# Altium PCB pacemakerv3_0.PcbDoc
Units mil, origin at the board's own origin, x right, y up, seen from the top; angles counter-clockwise.
Board outline 2432.01 x 2099.61 mil, 2 copper layers (Top, Bottom), stack 61.858 mil thick; 135 components, 95 nets, 412 pads, 135 vias.
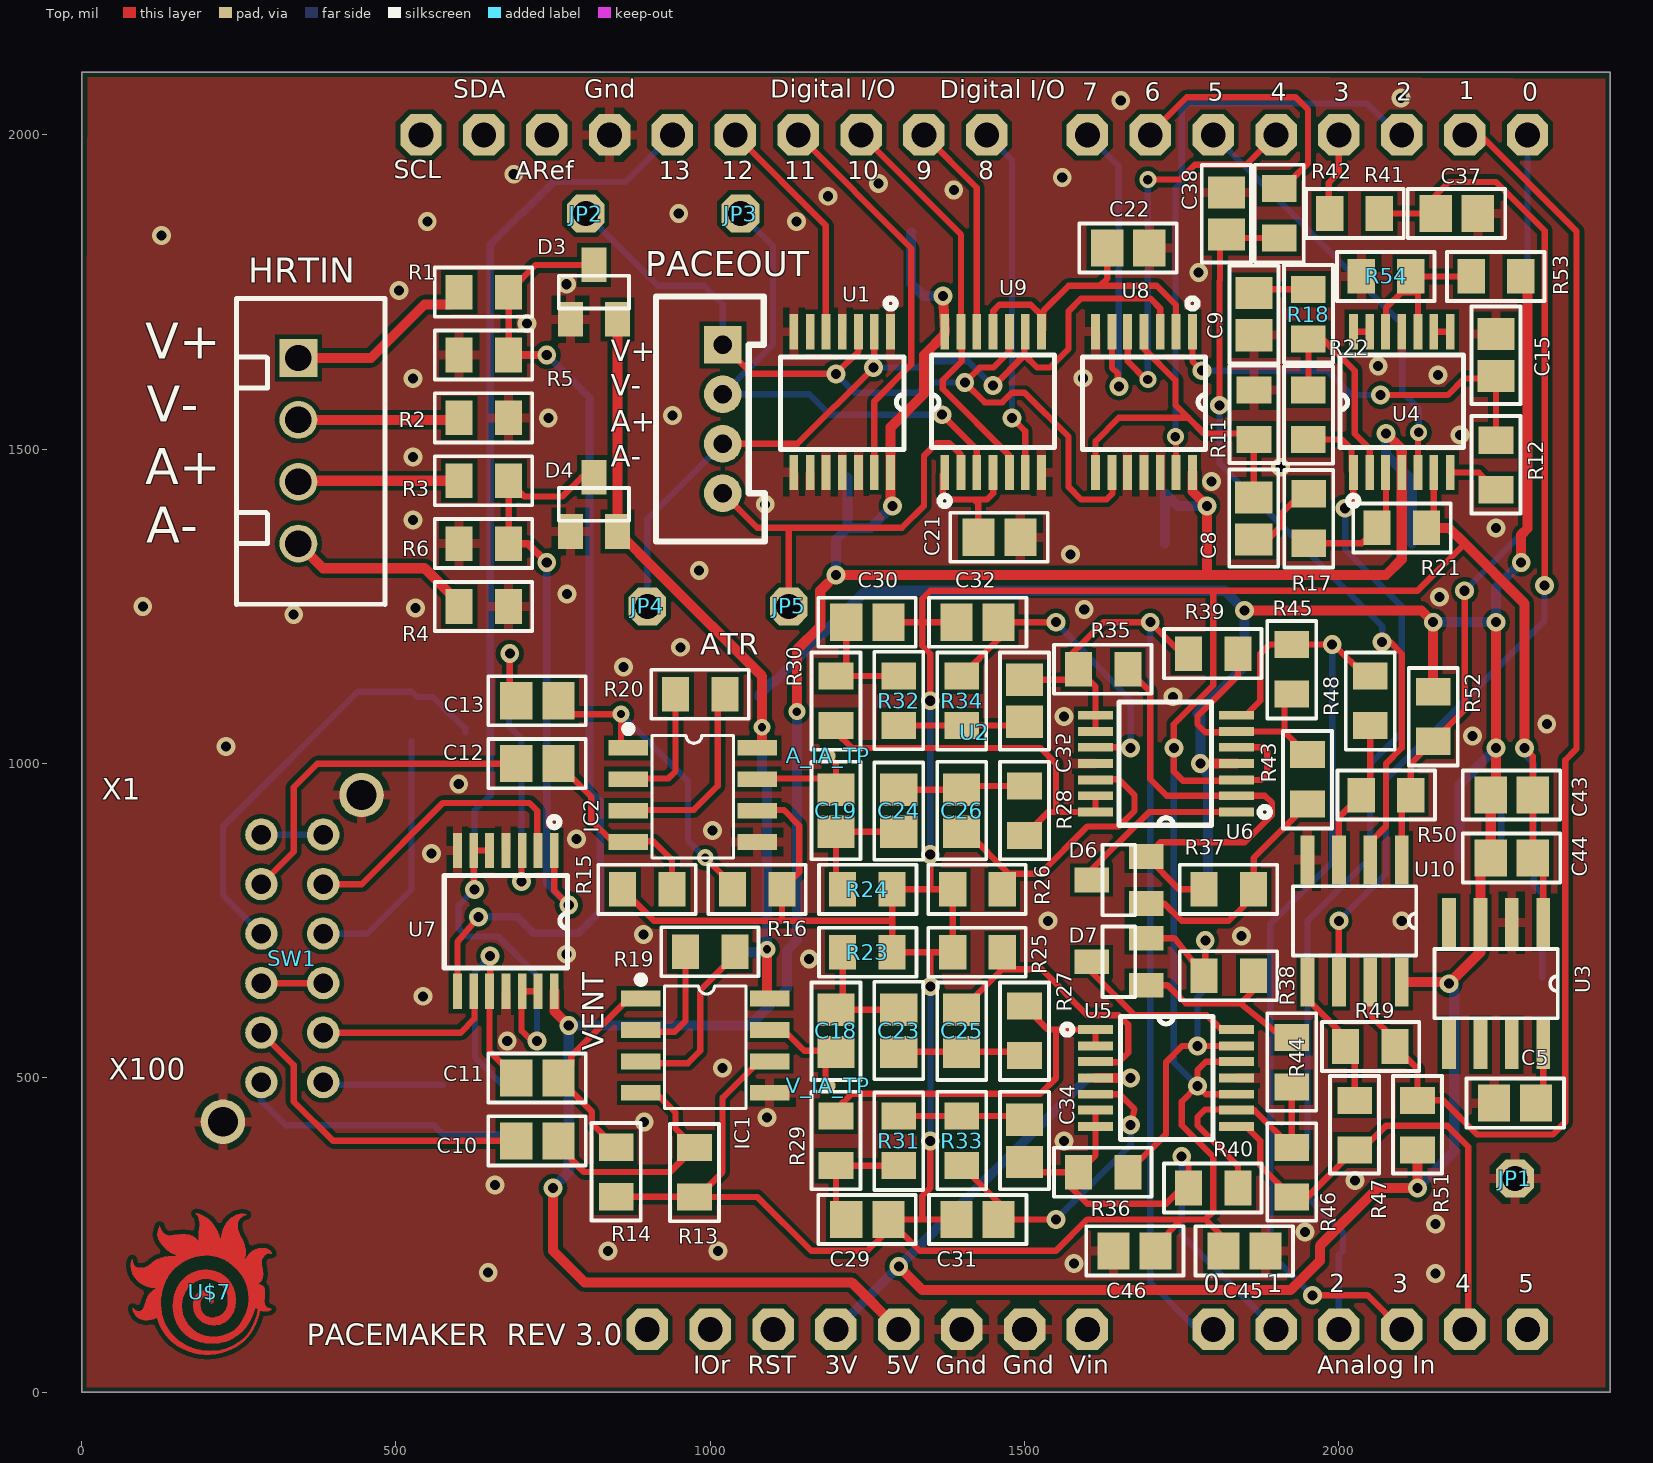
[diagram p0: Top view]
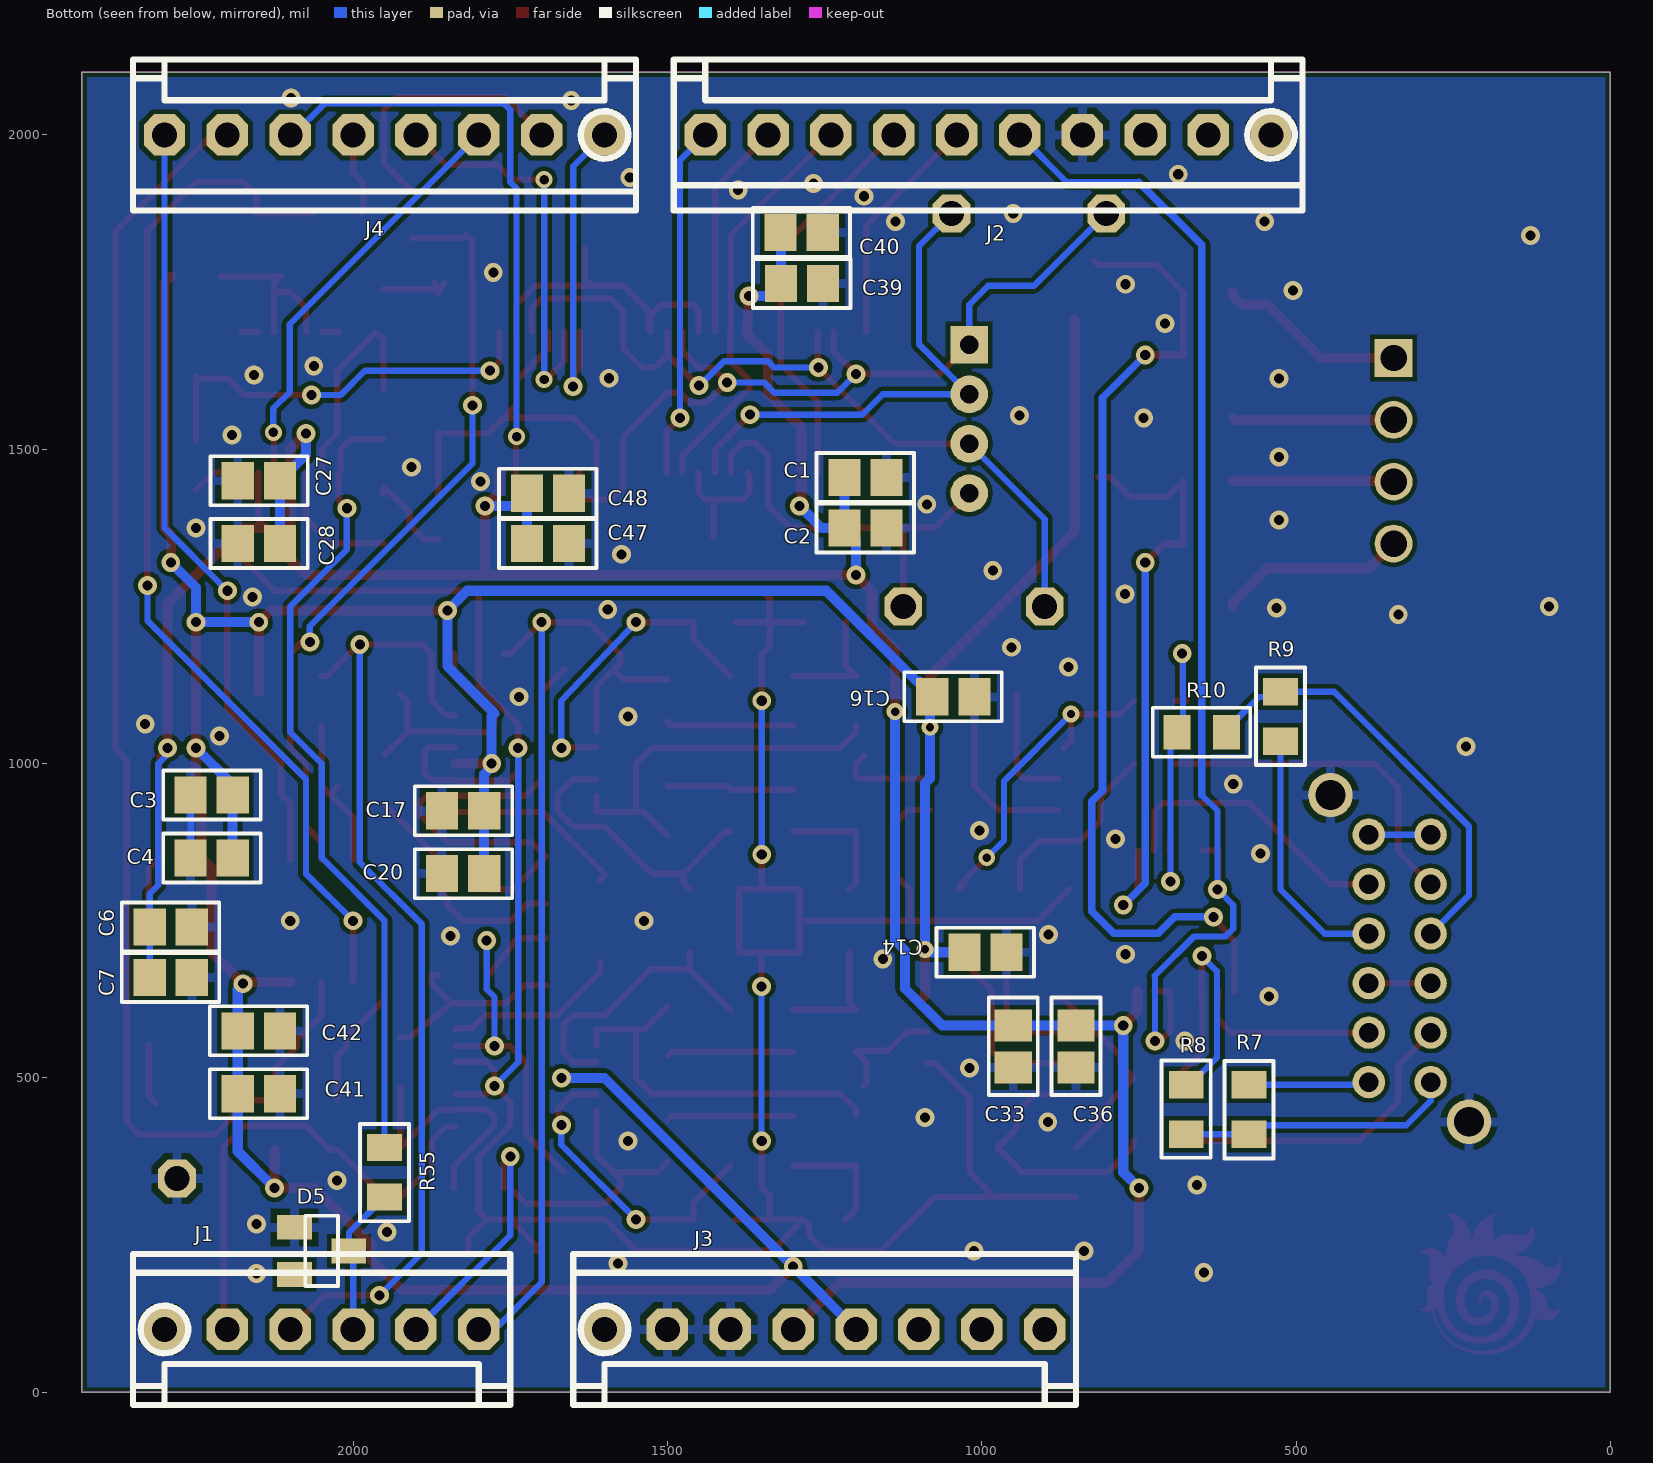
[diagram p1: Bottom view, seen from below]

## Layer stack, top to bottom
Top Solder: solder mask 0.4, Solder Resist, Dk 3.5
Top: signal copper 1.4016
Dielectric 1: dielectric 59.0551, FR-4, Dk 4.8
Bottom: signal copper 1.4016
Bottom Solder: solder mask 0.4, Solder Resist, Dk 3.5

## Board outline
0,0 0,2099.61 2432.01,2099.61 2432.01,0

## Design rules (kind name [scope] priority, off if disabled: settings)
Clearance [All] p1: gap=7 ignorepadtopadclearanceinfootprint=FALSE
HoleSize [All] p1: absolutevalues=TRUE maxlimit=100000 minlimit=13 maxpercent=80.000 minpercent=20.000
HoleToHoleClearance mdDrill [All] p1: gap=6 allowstackedmicrovias=TRUE
MinimumSolderMaskSliver [All] p1 off: minsoldermaskwidth=10
PasteMaskExpansion Expansion_SMDPaste_OFF [InPadClass('SMDPaste_OFF')] p1: expansion=0
PasteMaskExpansion mlMinCreamFrame [All] p2: expansion=0
PolygonConnect ThermalVias [IsVia] p1: connectstyle=Direct reliefconductorwidth=10 reliefentries=4 polygonreliefangle="90 Angle" airgapwidth=10
PolygonConnect [All] p2: connectstyle=Relief reliefconductorwidth=15 reliefentries=4 polygonreliefangle="90 Angle" airgapwidth=10
RoutingVias [All] p1: holewidth=13 width=27 viastyle="Through Hole" minholewidth=13 minwidth=27 maxholewidth=100 maxwidth=100
SolderMaskExpansion Expansion_SMDSolder_OFF [InPadClass('SMDSolder_OFF')] p1: expansion=0 istentingtop=FALSE
SolderMaskExpansion mlMinStopFrame [All] p2: expansion=4 istentingtop=FALSE
Width [All] p1: maxlimit=10000 minlimit=6 preferedwidth=6
26 further rules are at their usual default settings.

## Components (designator, comment, footprint, x,y, rotation, side; value= is the part's Value field where it differs from the comment)
A_IA_TP "TPSTP06R" TP06R 1187.5,1012.5 r0 top
C1 "*" C0805 1185,1455 r180 bottom value=0.1uF
C2 "*" C0805 1185,1375 r180 bottom value=1uF
C3 "*" C0805 2225,950 r0 bottom value=0.1uF
C4 "*" C0805 2225,850 r0 bottom value=1uF
C5 "*" C0805 2280,460 r180 top value=1uF
C6 "*" C0805 2290,740 r180 bottom value=0.1uF
C7 "*" C0805 2290,660 r180 bottom value=1uF
C8 "*" C0805 1864.5,1390 r270 top value=1uF
C9 "*" C0805 1865,1715 r90 top value=1uF
C10 "*" C0805 725,400 r0 top value=10uF
C11 "*" C0805 725,500 r0 top value=10uF
C12 "*" C0805 725,1000 r0 top value=10uF
C13 "*" C0805 725,1100 r0 top value=10uF
C14 "*" C0805 994.09,700 r180 bottom value=0.1uF
C15 "*" C0805 2250,1650 r90 top value=1uF
C16 "*" C0805 1045.27,1106.3 r180 bottom value=1uF
C17 "*" C0805 1825,925 r0 bottom value=0.1uF
C18 "*" C0805 1200,575 r90 top value=10uF
C19 "*" C0805 1200,925 r270 top value=10uF
C20 "*" C0805 1825,825 r0 bottom value=1uF
C21 "*" C0805 1460,1360 r0 top value=10uF
C22 "*" C0805 1665,1820 r0 top value=10uF
C23 "*" C0805 1300,575 r270 top value=1.5uF
C24 "*" C0805 1300,925 r90 top value=1.5uF
C25 "*" C0805 1400,575 r90 top value=1.5uF
C26 "*" C0805 1400,925 r270 top value=10uF
C27 "*" C0805 2150,1450 r0 bottom value=0.1uF
C28 "*" C0805 2150,1350 r0 bottom value=1uF
C29 "*" C0805 1250,275 r0 top value=0.1uF
C30 "*" C0805 1250,1225 r0 top value=0.1uF
C31 "*" C0805 1425,275 r180 top value=0.039uF
C32 "*" C0805 1425,1225 r180 top value=0.022uF
C33 "*" C0805 950,550 r270 bottom value=0.1uF
C34 "*" C0805 1500,400 r270 top value=0.39uF
C35 "*" C0805 1500,1100 r90 top value=0.22uF
C36 "*" C0805 850,550 r270 bottom value=1uF
C37 "*" C0805 2187.5,1875 r0 top value=1uF
C38 "*" C0805 1821,1875 r90 top value=1uF
C39 "*" C0805 1286.06,1763.82 r180 bottom value=0.1uF
C40 "*" C0805 1286.5,1844.68 r180 bottom value=1uF
C41 "*" C0805 2150,475 r180 bottom value=0.1uF
C42 "*" C0805 2150,575 r180 bottom value=1uF
C43 "*" C0805 2275,950 r0 top value=0.1uF
C44 "*" C0805 2275,850 r0 top value=1uF
C45 "*" C0805 1850,225 r0 top value=1uF
C46 "*" C0805 1675,225 r180 top value=0.1uF
C47 "*" C0805 1690,1350 r180 bottom value=1uF
C48 "*" C0805 1690,1430 r180 bottom value=0.1uF
D3 "BAT54S" SOT23 815,1750 r0 top
D4 "BAT54S" SOT23 815,1412.5 r0 top
D5 "*" SOT23 2050,225 r270 bottom value=BZX84C3V3LT1G
D6 "BAT54S" SOT23 1650,815 r90 top
D7 "BAT54S" SOT23 1650,685 r90 top
HRTIN "B4B-XH-A" B4B-XH-A 345,1645.28 r270 top
IC1 "AD8226" SOIC8_SMTC 889.76,626.38 r0 top
IC2 "AD8226" SOIC8_SMTC 869.8,1025.2 r0 top
J1 "LHS-06-TS" LHS-00-TS_OUTLINE 2300,100 r0 bottom
J2 "LHS-10-TS" LHS-10-TS_OUTLINE 540,2000 r180 bottom
J3 "LHS-08-TS" LHS-08-TS_OUTLINE 1600,100 r0 bottom
J4 "LHS-08-TS" LHS-08-TS_OUTLINE 1600,2000 r180 bottom
JP1 "PINHD-1X1" 1X01 2280,340 r0 top
JP2 "PINHD-1X1" 1X01 801.97,1875 r0 top
JP3 "PINHD-1X1" 1X01 1048.03,1875 r0 top
JP4 "PINHD-1X1" 1X01 900,1250 r0 top
JP5 "PINHD-1X1" 1X01 1125,1250 r0 top
PACEOUT "B4B-PH-K-S" B4B-PH-K-S 1020,1626.85 r270 top value=B4B-XH-A
R1 "*" R0805 640,1750 r0 top value=59
R2 "*" R0805 640,1550 r0 top value=59
R3 "*" R0805 640,1450 r0 top value=59
R4 "*" R0805 640,1250 r0 top value=59
R5 "*" R0805 640,1650 r0 top value=1M
R6 "*" R0805 640,1350 r0 top value=1M
R7 "*" R0805 575,450 r90 bottom value=100k
R8 "*" R0805 675,450 r270 bottom value=1k
R9 "*" R0805 525,1075 r270 bottom value=100k
R10 "*" R0805 650,1050 r180 bottom value=1k
R11 "*" R0805 1865,1555 r270 top value=5.49k
R12 "*" R0805 2250,1475 r270 top value=3.3k
R13 "*" R0805 975,350 r90 top value=10k
R14 "*" R0805 850.39,350.39 r270 top value=10k
R15 "*" R0805 900,800 r0 top value=10k
R16 "*" R0805 1075,800 r0 top value=10k
R17 "*" R0805 1952,1390 r90 top value=249k
R18 "*" R0805 1951.5,1715 r270 top value=249k
R19 "*" R0805 1000,700.79 r0 top value=1.02k
R20 "*" R0805 984.25,1110.24 r0 top value=1.02k
R21 "*" R0805 2100,1375 r180 top value=249k
R22 "*" R0805 1951.5,1555 r90 top value=249k
R23 "*" R0805 1250,700 r180 top value=330k
R24 "*" R0805 1250,800 r180 top value=330k
R25 "*" R0805 1425,700 r0 top value=1.4M
R26 "*" R0805 1425,800 r0 top value=330k
R27 "*" R0805 1500,575 r90 top value=715k
R28 "*" R0805 1500,925 r270 top value=715k
R29 "*" R0805 1200,400 r270 top value=39k
R30 "*" R0805 1200,1100 r90 top value=22.1k
R31 "*" R0805 1300,400 r90 top value=7.5k
R32 "*" R0805 1300,1100 r270 top value=7.5k
R33 "*" R0805 1400,400 r270 top value=133k
R34 "*" R0805 1400,1100 r90 top value=133k
R35 "*" R0805 1625,1150 r0 top value=4.99k
R36 "*" R0805 1625,350 r0 top value=4.99k
R37 "*" R0805 1825,800 r0 top value=4.99k
R38 "*" R0805 1825,662.5 r0 top value=4.99k
R39 "*" R0805 1800,1175 r0 top value=10k
R40 "*" R0805 1800,325 r0 top value=10k
R41 "*" R0805 2025,1875 r180 top value=3.3k
R42 "*" R0805 1905,1875.5 r90 top value=10k
R43 "*" R0805 1950,975 r90 top value=4.99k
R44 "*" R0805 1925,525 r270 top value=4.99k
R45 "*" R0805 1925,1150 r90 top value=10k
R46 "*" R0805 1925,350 r270 top value=10k
R47 "*" R0805 2025,425 r270 top value=10k
R48 "*" R0805 2050,1100 r90 top value=10k
R49 "*" R0805 2050,550 r180 top value=10M
R50 "*" R0805 2075,950 r180 top value=10M
R51 "*" R0805 2125,425 r270 top value=10k
R52 "*" R0805 2150,1075 r90 top value=10k
R53 "*" R0805 2250,1775 r0 top value=510k
R54 "*" R0805 2075,1775 r0 top value=510k
R55 "*" R0805 1950,350 r90 bottom value=59
SW1 "EG4208" EG4208-PACKAGE 225,950 r180 top
U1 "CD74HC4066PWR" SOP65P640X110-14N 1210,1575 r270 top
U2 "ARDUINOR3-DIMENSION" ARDUINOR3 -200,0 r0 top locked
U3 "TLE2426CDR" SOIC127P600X175-8N 2250,650 r270 top
U4 "LMV344MT" SOP65P640X110-14N 2100,1575 r90 top
U5 "LMV344MT" SOP65P640X110-14N 1725,500 r0 top
U6 "LMV344MT" SOP65P640X110-14N 1725,1000 r180 top
U7 "CD74HC4066PWR" SOP65P640X110-14N 675,750 r270 top
U8 "CD74HC4066PWR" SOP65P640X110-14N 1690,1575 r270 top
U9 "CD74HC4066PWR" SOP65P640X110-14N 1450,1575 r90 top
U10 "MCP6547-E/SN" SOIC127P600X175-8N 2025,750 r270 top
U$7 "" FIREBALL 203.6,160.1 r0 top
V_IA_TP "TPSTP06R" TP06R 1187.5,487.5 r0 top

## Footprints (in the part's own frame and the unit in brackets; to place one, negate y for a bottom-side part, rotate by r counter-clockwise, add the part's x,y. Pads: shape width x height; smd on the part's side, far side on the other; paste and mask are expansions set on the pad)
1X01 [mil] "1X01"
  oct 60x60 / inner round 0 / far side oct 60x60 hole 40: 1(0,0)
ARDUINOR3 [mil] "ARDUINOR3"
  oct 66x66 / inner round 0 / far side oct 66x66 hole 39.37: 3V(1400,100) 5V(1500,100) A0(2000,100) A1(2100,100) A2(2200,100) A3(2300,100) A4(2400,100) A5(2500,100) AREF(940,2000) D0(2500,2000) D1(2400,2000) D2(2300,2000) D3(2200,2000) D4(2100,2000) D5(2000,2000) D6(1900,2000) D7(1800,2000) D8(1640,2000) D9(1540,2000) D10(1440,2000) D11(1340,2000) D12(1240,2000) D13(1140,2000) GND(1040,2000) GND1(1700,100) GND2(1600,100) IOREF(1200,100) RESERVED(1100,100) RESET(1300,100) SDA(840,2000) VIN(1800,100)
  oct 66x66 hole 39.37: SCL(740,2000)
B4B-PH-K-S [mil]
  rect 60x60 / inner round 60 / far side rect 60x60 hole 30: 1(-39.37,0)
  round 60 hole 30: 2(39.37,0) 3(118.11,0) 4(196.85,0)
  silkscreen extent -116,-106 274,67, body extent -116,-110 274,67, height 236
B4B-XH-A [mil]
  rect 60x60 hole 42: 1(0,0)
  round 60 hole 42: 2(98.43,0) 3(196.85,0) 4(295.28,0)
  silkscreen extent -94,-98 392,138, body extent -96,-94 392,132, height 276
C0805 [mil] "C0805"
  rect 51.18x59.06 smd: 1(-33.46,0) 2(33.46,0)
  Top keep-out lines w2: 77.68,-38.7 77.68,38.7 -77.68,38.7 -77.68,-38.7 77.68,-38.7
  silkscreen extent -78,-39 77,39
EG4208-PACKAGE [mil] "EG4208-PACKAGE"
  round 51.5 / inner round 0 / far side round 51.5 hole 31.5: 1(-61.02,456.69) 2(-61.02,377.95) 3(-61.02,299.21) 4(-61.02,220.47) 5(-61.02,141.73) 6(-61.02,62.99) 7(-159.45,456.69) 8(-159.45,377.95) 9(-159.45,299.21) 10(-159.45,220.47) 11(-159.45,141.73) 12(-159.45,62.99)
  round 70.86 / inner round 0 / far side round 70.86 hole 47.24: NC1(0,519.68) NC2(-220.47,0)
FIREBALL [mil] "FIREBALL"
  Top drawing of 1562 lines, arcs and shapes, not listed
LHS-00-TS_OUTLINE [mil]
  silkscreen extent -550,-120 50,120, body extent -555,-125 55,125, height 394
LHS-08-TS_OUTLINE [mil]
  silkscreen extent -750,-120 50,120
LHS-10-TS_OUTLINE [mil]
  silkscreen extent -950,-120 50,120
R0805 [mm] "R0805"
  rect 1.1x1.4 smd: 1(-1,0) 2(1,0)
  Top keep-out lines w0.051: -1.973,-0.983 1.973,-0.983 1.973,0.983 -1.973,0.983 -1.973,-0.983
  silkscreen extent -1.98,-0.99 1.96,0.99
SOIC8_SMTC [mil]
  rect 63x25 smd: 1(0,0) 2(0,-50) 3(0,-100) 4(0,-150) 5(205,-150) 6(205,-100) 7(205,-50) 8(205,0)
  silkscreen extent -5,-175 167,35, body extent -16,-171 220,21, height 67
SOIC127P600X175-8N [mil] "SOIC127P600X175-8N"
  rect 78x22 smd: 1(-97,75) 2(-97,25) 3(-97,-25) 4(-97,-75) 5(97,-75) 6(97,-25) 7(97,25) 8(97,75)
  silkscreen extent -55,-98 55,98
SOP65P640X110-14N [mil] "SOP65P640X110-14N"
  rect 56x14 smd: 1(-112,77) 2(-112,51) 3(-112,26) 4(-112,0) 5(-112,-26) 6(-112,-51) 7(-112,-77) 8(112,-77) 9(112,-51) 10(112,-26) 11(112,0) 12(112,26) 13(112,51) 14(112,77)
  silkscreen extent -165,-98 75,98
SOT23 [mm] "SOT23"
  rect 1x1.4 smd: 1(-0.95,-1.1) 2(0.95,-1.1) 3(0,1.1)
  silkscreen extent -1.42,-0.66 1.42,0.66
TP06R [mil] "TP06R"
  rrect100% 23.62x23.62 smd paste+0: TP(0,0)

## Part data
A_IA_TP V_IA_TP: "TEST PIN"
C1 C2 C3 C4 C5 C6 C7 C8 C9 C10 C11 C12 C13 C14 C15 C16 C17 C18 C19 C20 C21 C22 C23 C24 C25 C26 C27 C28 C29 C30 C31 C32 C33 C34 C35 C36 C37 C38 C39 C40 C41 C42 C43 C44 C45 C46 C47 C48: library part C-USC0805, "CAPACITOR, American symbol"
  C46 C48: =0.1uF
D3 D4 D6 D7: "Schottky Diodes   Pin connection corrected 2011-05-04 Source: Fairchild .. BAT54.pdf"
D5: library part ZENER-DIODESOT23, "Z-Diode"
HRTIN PACEOUT: library part CON4, "Conn mFit 2x2M Strgt.", Manufacturer=Molex, Price=0
IC1 IC2: "Wide Supply Range, Rail-to-Rail Output Instrumentation Amplifier", MPN=AD623ARZ., +V=+V, -V=-V, DeviceName=R, DeviceSetName=AD8266, GateName_1=G$1, LibraryName=analog-devices, MF=MF, OC_FARNELL=9426213, OC_NEWARK=31M4186, RG=RG, SymbolName_1=AD8226
J1: library part "SIP Header 6 Outline", "CONN HEADER VERT 6 POS 2.54MM", Manufacturer="Adam Tech", Price=1.65
J2: library part "SIP Header 10 Outline", "CONN HEADER VERT 10POS 2.54MM", Manufacturer="Adam Tech", Price=0.31
J3 J4: library part "SIP Header 8 Outline", "Header, 8-Pin", Manufacturer="Adam Tech", Price=1.65
JP1 JP2 JP3 JP4 JP5: "PIN HEADER"
R1 R2 R3 R4 R5 R6 R7 R8 R9 R10 R11 R12 R13 R14 R15 R16 R17 R18 R19 R20 R21 R22 R23 R24 R25 R26 R27 R28 R29 R30 R31 R32 R33 R34 R35 R36 R37 R38 R39 R40 R41 R42 R43 R44 R45 R46 R47 R48 R49 R50 R51 R52 R53 R54 R55: library part R-US_R0805, "RESISTOR, American symbol"
U2: "This is a new object for the new Arduino R3 - with extra pins that you may want to use (such as IOref, and duplicated A4/A5"
U3: "Precision Virtual Ground"
U10: "Open-Drain Output Sub-Microamp Comparators"
U$7: library part FIREBALL, PackageName=FIREBALL

## Via types
v1: diameter 30/30 (per signal layer), hole 16, Top to Bottom, 126 vias
v2: diameter 27, hole 13, Top to Bottom, 5 vias
v3: diameter 27, hole 15, Top to Bottom, 4 vias

## Nets (pads, with @x,y where several pads share a name; then routed paths per layer and width w, separated by ;. In a path a pad name is that pad's centre, name@x,y a point inside that pad or via, vN(x,y) a via of type N, cw(c..) or ccw(c..) an arc to the next point about the centre after c; other vN are vias at no path point)
+3V3: C3.1 C4.1 C14.1 C16.1 C17.1 C20.1 C41.1 C42.1 C43.1 C44.1 D3.2 D4.2 IC1.8 IC2.8 R51.2 R52.2 R53.2 U2.3V U3.3 U5.4 U6.4 U10.8 | length 6702.2
  Top w16: D3.2 D4.2 919.53,1302.06 1082.68,1138.91 v2@1082.68,1059.06 ; IC2.8@1082.4,1025.2 v2(1082.4,1057.87) ; v2(1090.55,704.72) 1090.55,630.31 IC1.8@1094.48,626.38 ; v1(1300,200) 1337.5,162.5 1923.13,162.5 1969.69,209.06 1969.69,233.07 2061.61,325 v1(2125,325) R51.2 ; U5.4 v1(1668.75,500) ; v1(1779.53,1000) U6.4 ; v1(1850,1243.75) 2131.25,1243.75 v1(2150,1225) R52.2 ; U10.8 v1@2178,653 ; v1(2175,650) v1@2178,653 ; v1(2250,1225) v1(2250,1025) 2250,958.46 C43.1 C44.1 2225,833.46 U3.3 2225,700 v1@2178,653 ; R53.2 2300,1764.37 2300,1374.02 2290,1364.02 v1(2290,1320)
  Bottom w16: C14.1 1093.7,700 v2@1094.49,700.79 ; v2(1090.55,704.72) 1090.55,968.5 1082.68,976.38 1082.68,1059.06 1082.68,1102.35 C16.1 1078.73,1110.24 1099.32,1130.83 1103.26,1130.83 1247.43,1275 1818.75,1275 v1(1850,1243.75) 1850,1155 1775,1080 1779.53,1075.47 v1(1779.53,1000) 1779.53,995.47 1791.54,983.46 C17.1 C20.1 ; U2.3V v1(1300,200) 1600,500 v1(1668.75,500) ; v1(2125,325) 2183.46,383.46 C41.1 C42.1 2183.46,641.54 v1(2175,650) ; v1(2150,1225) v1(2250,1225) 2250,1280 v1(2290,1320) ; C4.1 C3.1 2191.54,966.54 v1(2250,1025)
+5V: C1.1 C2.1 C27.1 C28.1 C33.1 C36.1 C39.1 C40.1 C47.1 C48.1 U1.14 U2.5V U4.4 U7.14 U8.14 U9.14 | length 4519.8
  Top w16: v1(750,325) 750,225 800,175 1225,175 U2.5V ; U7.14@752,610.4 U7.14 752,606.46 v1(775,583.46) ; v2(1137.8,1082.68) 1137.8,1181.1 1175,1218.31 1175,1275 v1(1200,1300) 1790,1300 ; v1(1290,1410) 1287,1413 U1.14 1287,1535.03 1340,1588.03 1340,1650 1373,1683 U9.14 1373.46,1687.46 v1(1370.46,1743.82) ; U8.14 1767,1433 v1(1790,1410) 1790,1300 ; v1(2075,1525) 2100,1500 U4.4 2100,1325 2075,1300 1790,1300
  Bottom w16: v1(750,325) 775,350 v1(775,583.46) ; v1@778.94,583.46 C36.1 C33.1 1062.99,583.46 1122.05,642.52 1122.05,702.85 1137.8,718.59 v2(1137.8,1082.68) ; v1(1200,1300) 1200,1356.54 C2.1 ; C1.1 C2.1 ; v1(1290,1410) 1255,1375 C2.1 ; C40.1 1319.53,1844.24 C39.1 1339.53,1743.82 v1(1370.46,1743.82) ; C47.1 C48.1 1743.46,1410 v1(1790,1410) ; v1(2075,1525) 2075,1491.54 C27.1 C28.1
GND: C1.2 C2.2 C3.2 C4.2 C5.2 C6.2 C7.2 C9.1 C14.2 C15.2 C16.2 C17.2 C20.2 C21.2 C22.2 C27.2 C28.2 C33.2 C36.2 C37.2 C38.2 C39.2 C40.2 C41.2 C42.2 C45.2 C46.2 C47.2 C48.2 D3.1 D4.1 D5.1 IC1.5 IC2.5 JP1.1 R2.2 R4.2 R5.1 R6.1 R11.1 R54.1 SW1.NC1 SW1.NC2 U1.1 U1.4 U1.7 U1.8 U1.9 U1.10 U1.11 U1.12 U2.GND U2.GND1 U2.GND2 U3.2 U4.11 U5.11 U6.11 U7.4 U7.7 U7.11 U8.7 U8.10 U8.11 U8.12 U9.7 U10.4 | length 100
  Bottom w10: C4.2 C3.2
  other v1: 2153.54,188.98 646.87,190.63 1578.74,204.72 837.5,225 1012.5,225 1946.06,255.12 2153.54,267.72 657.5,330 2025.69,336.81 1562.5,400 895,430 1090.55,437.01 1019.68,515.75 677.17,559.06 543.31,629.92 1157.48,688.98 771.65,696.85 1844.88,725.69 893.7,728.35 1537.5,750 2100,750 556.5,856.79 787.5,880 1003.94,893.7 600,967.5 230,1027.5 2212.5,1043.75 2330.71,1062.99 1562.5,1075 1736.22,1106.3 862.2,1153.54 952.76,1185.04 337.5,1237.5 1595,1245 531.25,1247.5 97.5,1250 2160,1265 772.5,1270 982.5,1307.5 1573,1333 2250,1375 527.5,1387.5 1087.5,1412.5 1797.5,1448.5 1907,1471.5 527.5,1487.5 2192.5,1522.5 742.5,1550 940,1554 527.5,1612.5 1593,1613 2157.48,1618.11 2062.5,1632.5 708.75,1700 505,1752.5 771.25,1762.5 1777,1781 127.5,1840 550,1862.5 1137.5,1862.5 950,1875 1187.5,1902.5 1387.5,1912.5 1267.5,1922.5 1560,1932.5 687.5,1937.5 1653,2055 2099,2059
NetA_IA_TP_TP: A_IA_TP.TP C19.1 IC2.7 | length 157
  Top w10: IC2.7@1082.68,976.38 1197.15,976.38 1200,979.23 1200,1000 A_IA_TP.TP
NetC5_1: C5.1 U3.8 | length 97.8
  Top w10: C5.1 2325,471.54 U3.8
NetC6_1: C6.1 C7.1 C29.2 C30.2 C31.2 C32.2 C43.2 C44.2 C45.1 C46.1 IC1.6 IC2.6 R13.1 R14.2 R15.1 R16.2 R21.1 R23.1 R24.1 R25.1 R26.1 U3.1 U4.6 U5.10 U5.12 U6.3 U6.5 | length 7249.2
  Top w10: R14.2 974.61,311.02 R13.1 ; R15.1 910.63,750 1114.37,750 ; IC2.6@1082.68,926.38 1116.93,926.38 1141.73,901.57 1141.73,827.36 R16.2 1114.37,750 ; IC1.6@1086.61,523.62 1074.8,523.62 1019.68,468.5 1019.68,350.39 979.92,310.63 R13.1 ; C30.2 1337.5,1225 ; v1(1350,400) 1350,325 1337.5,312.5 1337.5,275 ; v1(1350,855.31) 1350,800 ; v1(1350,1100) 1350,1175 1337.5,1187.5 1337.5,1225 ; v1(1350.39,645.67) 1350.39,699.6 1350,700 ; C31.2 1337.5,275 ; C32.2 1337.5,1225 ; C46.1 1708.46,233.46 1750,275 ; C45.1 1816.54,245.96 1787.5,275 ; U5.10 1788.5,474 v1(1775,487.5) ; U5.12 1788.5,526 1775,512.5 v1(1775,487.5) ; U6.5 1879.51,1026 1885.83,1019.68 1885.83,984.25 1875.57,974 U6.3 1836,973 1752,973 1737.5,987.5 v1(1737.5,1025) 1737.5,1062.5 1800,1125 1800,1275 ; R21.1 2151,1388.37 U4.6 ; 2200,1350 2125,1275 1800,1275 ; v1(2295,1025) 2308.46,1011.54 C43.2 C44.2 2325,833.46 U3.1 ; R13.1 1075,310.63 1160.63,225 1250,225 1275,250 1275,266.54 C29.2 ; 1114.37,750 1289.37,750 ; C29.2 1337.5,275 ; C29.2 1333.46,225 1550,225 1600,275 1750,275 ; 1289.37,750 R23.1 1350,700 ; 1289.37,750 R24.1 1350,800 ; 1337.5,1225 1337.5,1262.5 1350,1275 1800,1275 ; 1350,700 R25.1 R26.1 1350,800 ; 1750,275 1787.5,275 ; v1(1775,487.5) 1750,462.5 1750,425 1800,375 1800,287.5 1787.5,275
  Top w16: R21.1 2175,1375 2200,1350 2295,1255 v1(2295,1025)
  Bottom w10: v1(1350,400) 1350.39,400.39 v1(1350.39,645.67) ; v1(1350,855.31) 1350,1092.91 1346.46,1096.46 v1(1350,1100) ; v1(1737.5,1025) 1737.5,525 v1(1775,487.5) ; v1(2295,1025) 2295,1015 2310,1000 2310,806.54 2323.46,793.07 C6.1 C7.1
NetC8_1: C8.1 R11.2 U8.4 U8.8 | length 604.6
  Top w10: U8.8 1613,1513 1650,1550 1760.63,1550 ; U8.4 1690,1660 1740,1610 1740,1570.63 1760.63,1550 ; C8.1 R11.2@1864.5,1525.13 ; R11.2 R11.2@1864.5,1525.13 ; 1760.63,1550 1785.5,1525.13 R11.2@1864.5,1525.13
NetC8_2: C8.2 R17.2 | length 141.4
  Top w10: C8.2 1886.54,1356.54 1910,1380 1910,1399 1950.37,1439.37 R17.2
NetC9_2: C9.2 R18.1 | length 124.2
  Top w10: C9.2@1855.91,1764.37 C9.2 ; C9.2@1870.91,1764.37 C9.2 ; R18.1 1870.91,1754.37 C9.2
NetC10_1: C10.1 SW1.2 | length 510.8
  Top w10: SW1.2 337.5,520.57 337.5,462.5 400,400 C10.1
NetC10_2: C10.2 IC1.4 R13.2 | length 401.3
  Top w10: C10.2 758.46,391.15 799.21,350.39 823.58,350.39 877.21,350.39 936.02,350.39 R13.2 944.88,419.49 944.88,444.88 916.14,473.62 IC1.4@881.89,473.62
NetC11_1: C11.1 R8.1 U7.10 | length 495.1
  Top w10: v1(650,693.75) 650,615.17 U7.10 649,542.54 C11.1
  Bottom w10: v1(650,693.75) 625.98,669.73 625.98,532.48 R8.1@652.44,506.03 ; R8.1@652.44,506.02 669.1,489.37 R8.1
NetC11_2: C11.2 IC1.1 R14.1 | length 340.6
  Top w10: R14.1 850,389.76 811.69,428.07 811.69,446.77 C11.2 779.05,520.59 779.05,534.96 870.47,626.38 IC1.1
NetC12_1: C12.1 SW1.5 | length 545.1
  Top w10: SW1.5 337.5,859.74 337.5,962.5 375,1000 C12.1
NetC12_2: C12.2 IC2.4 R15.2 | length 313.2
  Top w10: C12.2 811.02,947.44 811.02,909.45 844.09,876.38 877.96,876.38 909.45,876.38 939.37,846.46 R15.2
NetC13_1: C13.1 R10.1 U7.3 | length 560.6
  Top w10: v1(681.25,1175) 681.25,1130 681.25,1106.25 675,1100 C13.1 ; v1(700,812.5) 700,884.83 U7.3
  Bottom w10: v1(681.25,1175) 680,1173.75 680,1059.37 700,1039.37 v1(700,812.5)
NetC13_2: C13.2 IC2.1 R16.1 | length 534.2
  Top w10: C13.2 779.72,1078.74 v2(858.27,1078.74) 858.27,1036.73 IC2.1 ; v2(992.13,850.39) 1035.63,806.89 R16.1 R16.1@1025,810.63
  Bottom w10: v2(858.27,1078.74) 964.57,972.44 964.57,877.95 v2(992.13,850.39)
NetC15_1: C15.1 R12.1 U8.1 | length 667
  Top w10: U8.1 1767,1640 v1(1782,1625) ; v1(2066.25,1586.25) 2172.86,1586.25 2199.15,1612.54 2246,1612.54 C15.1 2250,1612.54 R12.1
  Bottom w10: v1(1782,1625) 1981.25,1625 2020,1586.25 v1(2066.25,1586.25)
NetC18_1: C18.1 IC1.7 V_IA_TP.TP | length 189.2
  Top w10: IC1.7@1086.61,573.62 1119.29,573.62 1149.61,543.31 1198.23,543.31 C18.1 1183.46,525 1183.46,491.54 V_IA_TP.TP
NetC18_2: C18.2 C23.1 R23.2 | length 195.9
  Top w10: R23.2 1210.63,619.09 C18.2 C23.1
NetC19_2: C19.2 C24.1 R24.2 | length 195.9
  Top w10: R24.2 1200,810.63 C19.2 C24.1
NetC21_1: C21.1 U9.1 U9.4 | length 218.2
  Top w10: U9.1 1370,1460 1370,1430 1380,1420 1420,1420 ; C21.1 1426.54,1413.46 1420,1420 ; U9.4 1450,1430 1440,1420 1420,1420
NetC22_1: C22.1 U8.2 U9.8 U9.11 | length 528.6
  Top w10: U9.11 1450,1720 1460,1730 1510,1730 1527,1713 U9.8 1530,1690 1530,1720 1570,1760 1620,1760 ; C22.1 1631.54,1771.54 1620,1760 ; U8.2 1741,1729 1710,1760 1620,1760
NetC23_2: C23.2 C25.1 R27.1 | length 202.4
  Top w10: C23.2 C25.1 1494.09,541.54 R27.1
NetC24_2: C24.2 C26.1 R28.1 | length 202.4
  Top w10: C24.2 C26.1 1405.91,964.37 R28.1
NetC25_2: C25.2 R25.2 U5.3 | length 458.8
  Top w10: C25.2 R25.2@1464.37,672.83 ; R25.2 R25.2@1464.37,672.83 ; U5.3 1614,525 1650,525 1665,540 1665,585 1650,600 1600,600 1527.17,672.83 R25.2@1464.37,672.83
NetC26_2: C26.2 R26.2 U6.12 | length 471.2
  Top w10: C26.2 1408.46,891.54 R26.2@1475,825 ; R26.2 1475,810.63 R26.2@1475,825 ; U6.12 1614,975 1650,975 1675,950 1675,925 1650,900 1600,900 1525,825 R26.2@1475,825
NetC29_1: C29.1 R29.2 R31.1 | length 192.5
  Top w10: C29.1 1200,291.54 R29.2 R31.1
NetC30_1: C30.1 R30.2 R32.1 | length 192.5
  Top w10: C30.1 1216.54,1155.91 R30.2 R32.1
NetC31_1: C31.1 R33.2 U5.5 | length 498.3
  Top w10: R33.2 1458.46,302.17 C31.1 v1(1550,275) ; U5.5 1651,474 1675,450 v1(1668.75,425)
  Bottom w10: v1(1550,275) 1668.75,393.75 v1(1668.75,425)
NetC32_1: C32.1 R34.2 U6.10 | length 515.1
  Top w10: R34.2 1458.46,1197.83 C32.1 v1(1550,1225) ; U6.10 1674,1026 v1(1668.75,1025)
  Bottom w10: v1(1550,1225) 1668.75,1100 v1(1668.75,1025)
NetC34_1: C34.1 R31.2 R33.1 | length 202.4
  Top w10: R31.2 R33.1 1494.09,439.37 C34.1
NetC34_2: C34.2 R36.1 R40.1 U2.A1 U5.6 U5.7 | length 845.1
  Top w10: C34.2 1516.54,350 R36.1 ; U5.6 U5.7 1613,377.37 R36.1 ; v1(1750,375) 1760.63,364.37 R40.1 1760.63,335.63 1725,300 1600,300 1575,325 1575,339.37 R36.1
  Bottom w10: v1(1750,375) 1750,250 U2.A1
NetC35_1: C35.1 R32.2 R34.1 | length 202.4
  Top w10: R32.2 R34.1 1494.09,1060.63 C35.1
NetC35_2: C35.2 R35.1 R39.1 U2.A0 U6.8 U6.9 | length 1640.3
  Top w10: C35.2 1569.09,1133.46 R35.1 ; U6.9 U6.8 1613,1122.63 R35.1 ; R39.1 1750,1175 v1(1700,1225) 1625,1225 1575,1175 1575,1160.63 R35.1
  Bottom w10: v1(1700,1225) 1700,175 1775,100 U2.A0
NetC37_1: C37.1 R41.1 U10.6 | length 1663.1
  Top w10: U10.6 v1(2000,750) ; R41.1 C37.1 2154.04,1904.04 2175,1925 2250,1925 2327.5,1847.5 2327.5,1284.19 v1(2326.92,1283.61)
  Bottom w10: v1(2000,750) 2075,825 2075,975 2250.63,1150.63 2326.92,1226.92 v1(2326.92,1283.61)
NetC38_1: C38.1 R42.1 U10.2 | length 1233.5
  Top w10: v1(1810,1570) 1810,1767.5 1810.96,1768.46 1810.96,1831.5 C38.1 1826.41,1836.13 R42.1 ; U10.2 2050,875 2075,900 2075,1000 2100,1025 2100,1175 2081.25,1193.75 v1(2068.75,1193.75)
  Bottom w10: v1(1810,1570) 1810,1477.5 2068.75,1218.75 v1(2068.75,1193.75)
NetD3_3: D3.3 R1.2 R5.2 U7.8 | length 1593.4
  Top w10: U7.8 598,716.75 v1(631.25,756.25) ; R5.2 R1.2 722.68,1793.31 D3.3 D3.3@821.69,1800
  Top w12: R5.2 v1(740,1650)
  Bottom w12: v1(631.25,756.25) 692.79,756.25 719.04,730 790,730 825,765 825,940 808,957 808,1582 v1(740,1650)
NetD4_3: D4.3 R3.2 R6.2 U7.1 | length 987.8
  Top w10: R6.2 R3.2 704.37,1425 765,1425 795.81,1455.81 D4.3 ; U7.1 752,798 v1(775,775)
  Top w12: R6.2 710,1350 v1(740,1320)
  Bottom w12: v1(740,1320) 740,810 v1(775,775)
NetD5_3: D5.3 R55.1 U2.A2 | length 236.9
  Bottom w10: R55.1 2006.69,253.94 D5.3 2000,218.31 U2.A2
NetD6_1: D6.1 R37.2 R43.1 | length 380.5
  Top w10: D6.1 1722.4,777.6 1750,750 1825,750 1850,775 1850,785.63 R37.2 1864.37,850 R43.1
NetD6_2: D6.2 R35.2 R37.1 U6.2 | length 759.7
  Top w10: R35.2 1700,1114.37 1700,975 1726,949 U6.2 1882.25,949 1893.75,937.5 1893.75,918.75 1850,875 1715.91,875 D6.2 1745.71,800 R37.1
NetD6_3: D6.3 U6.1 | length 290.4
  Top w10: D6.3 1600,821.69 1600,825 1698,923 U6.1
NetD7_1: D7.1 R38.2 R44.1 | length 332.3
  Top w10: D7.1 1727.4,647.6 1756.25,618.75 1843.75,618.75 ; R38.2 1875,664.37 1875,650 1843.75,618.75 ; R44.1 1910.63,564.37 1843.75,618.75
NetD7_2: D7.2 R36.2 R38.1 U5.13 | length 673.5
  Top w10: R36.2 1725,410.63 1725,525 1751,551 v1(1775,551) U5.13 ; D7.2 1738.23,722.4 R38.1 1787.5,676.87 v1(1787.5,718.75)
  Bottom w10: v1(1775,551) 1775,628.62 1787.5,641.12 v1(1787.5,718.75)
NetD7_3: D7.3 U5.14 | length 284.8
  Top w10: D7.3 1606.69,668.31 1675.01,600 1790,600 1811,579 1835,579 U5.14
NetHRTIN_1: HRTIN.1 R1.1 | length 302.5
  Top w16: HRTIN.1 460.28,1645.28 545.44,1730.44 586.97,1730.44 600.63,1744.1 R1.1
NetHRTIN_2: HRTIN.2 R2.1 | length 256.9
  Top w16: HRTIN.2 597.48,1546.85 R2.1
NetHRTIN_3: HRTIN.3 R3.1 | length 256.3
  Top w16: HRTIN.3 346.57,1450 R3.1
NetHRTIN_4: HRTIN.4 R4.1 | length 300.5
  Top w16: HRTIN.4 384.23,1310.77 545.77,1310.77 600.63,1255.9 R4.1
NetIC1_2: IC1.2 R19.1 | length 196
  Top w10: IC1.2@881.89,573.62 943.7,573.62 960.63,590.55 R19.1
NetIC1_3: IC1.3 R19.2 | length 290.4
  Top w10: IC1.3@881.89,523.62 964.57,523.62 984.25,543.31 984.25,635.62 cw(c994.25,635.62) 987.18,642.69 1022.73,678.24 1039.37,694.88 R19.2
NetIC2_2: IC2.2 R20.1 | length 193.9
  Top w10: IC2.2@877.96,976.38 933.07,976.38 944.88,988.19 R20.1
NetIC2_3: IC2.3 R20.2 | length 291.4
  Top w10: IC2.3@877.96,926.38 973.62,926.38 1011.81,964.57 R20.2@1011.81,1106.3
NetJP2_1: JP2.1 PACEOUT.1 U1.3 U8.9 U9.10 | length 1379.1
  Top w10: PACEOUT.1 1066.22,1620 v1(1200,1620) 1236,1656 U1.3 ; U9.10 1476,1656 1450,1630 1428.75,1630 v1(1405,1606.25) 1436.73,1574.52 1464.52,1574.52 1480,1590 1500,1590 1570,1520 1570,1440 1590,1420 1630,1420 1640,1430 1640,1462 U8.9
  Bottom w10: JP2.1 916.97,1760 990,1760 1020,1730 PACEOUT.1 ; v1(1200,1620) 1230,1590 1330,1590 1346.25,1606.25 v1(1405,1606.25)
NetJP3_1: JP3.1 PACEOUT.2 U9.3 | length 819.3
  Top w10: v1(1368.75,1555) 1424,1499.75 U9.3
  Bottom w10: JP3.1 1100,1823.03 1100,1667.48 PACEOUT.2 1157.52,1587.48 1190,1555 v1(1368.75,1555)
NetJP4_1: JP4.1 PACEOUT.3 U1.2 U8.3 U9.9 | length 1322.3
  Top w10: PACEOUT.3 1138.74,1508.74 v1(1260,1630) 1261,1631 U1.2 ; v1(1450,1601.52) 1451.52,1601.52 1500,1650 ; U9.9 1500,1686 1500,1650 ; U8.3 1716,1724 1700,1740 1590,1740 1570,1720 1570,1660 1540,1630 1520,1630 1500,1650
  Bottom w10: JP4.1 900,1388.74 PACEOUT.3 ; v1(1260,1630) 1330,1630 1340,1640 1410,1640 1448.48,1601.52 v1(1450,1601.52)
NetJP5_1: JP5.1 PACEOUT.4 U9.2 | length 665.4
  Top w10: PACEOUT.4 1075,1375 1125,1375 ; JP5.1 1125,1375 ; U9.2 1399,1491 1380,1510 1360,1510 1340,1490 1340,1410 1305,1375 1125,1375
NetR7_1: R7.1 R8.2 SW1.1 | length 440.4
  Bottom w10: SW1.1 286.02,463.98 325,425 560.63,425 R7.1 R8.2
NetR7_2: R7.2 SW1.7 | length 192.2
  Bottom w10: SW1.7 388.39,489.37 R7.2
NetR9_1: R9.1 R10.2 SW1.4 | length 700.3
  Bottom w10: SW1.4 225,790.55 225,900 439.37,1114.37 R9.1 533.24,1106.13 558.87,1106.13 592.44,1072.56 593.97,1072.56 610.63,1055.9 R10.2
NetR9_2: R9.2 SW1.10 | length 405.4
  Bottom w10: SW1.10 454.53,729.53 525,800 R9.2
NetR12_2: R12.2 U4.7 | length 84.3
  Top w10: U4.7 2222.63,1463 R12.2
NetR17_1: R17.1 R21.2 U4.3 | length 233.4
  Top w10: R17.1 2036.26,1350.63 R21.2 ; R21.2@2046.26,1360.63 R21.2 ; U4.3 2075,1462 2075,1389.37 R21.2
NetR18_2: R18.2 R22.2 U4.2 | length 356.1
  Top w10: R22.2 R18.2 1964.37,1685.63 2025,1625 2025,1525 2050,1500 2049,1499 U4.2
NetR22_1: R22.1 R55.2 U4.1 | length 1291.6
  Top w10: R22.1 2004.37,1515.63 2020,1500 2020,1466 U4.1 2023,1419.25 v1(2010,1406.25)
  Bottom w10: R55.2 1950,750 2050,850 2050,1000 2100,1050 2100,1250 2010,1340 v1(2010,1406.25)
NetR27_2: R27.2 R29.1 U5.1 U5.2 | length 612.8
  Top w10: R29.1 1200,450 1225,475 1525,475 1550,500 1550,577 ; R27.2 1537.37,577 1550,577 ; U5.2 U5.1 1550,577
NetR28_2: R28.2 R30.1 U6.13 U6.14 | length 612.8
  Top w10: R30.1 1200,1050 1225,1025 1525,1025 1550,1000 1550,923 ; R28.2 1537.37,923 1550,923 ; U6.13 U6.14 1550,923
NetR39_2: R39.2 R43.2 R45.1 U6.6 | length 399.4
  Top w10: R39.2 1839.37,1139.37 1775,1075 1775,1062.5 1787.5,1050 1836,1050 U6.6 1913.37,1051 ; R45.1 1913.37,1099 1913.37,1051 ; R43.2 1913.37,1051
NetR40_2: R40.2 R44.2 R46.1 U5.9 | length 415.7
  Top w10: R40.2 1839.37,360.63 1775,425 1775,437.5 1787.5,450 1836,450 U5.9 1865.37,449 R46.1 R44.2
NetR41_2: R41.2 U2.D3 | length 152.6
  Top w10: R41.2 1984,1876.63 1984,1924 2000,1940 U2.D3 U2.D3@1985.63,1985.63
NetR42_2: R42.2 U2.D6 | length 431.2
  Top w10: U2.D6 1700,2002 1758,2060 1931,2060 1951,2040 1951,1954.97 R42.2@1927.56,1931.53 ; R42.2@1907.95,1911.92 R42.2@1927.56,1931.53
NetR45_2: R45.2 R48.2 U2.A3 U6.7 | length 1595
  Top w10: U6.7 1852,1077 1875,1100 1875,1175 1889.37,1189.37 R45.2 ; R45.2@1926.87,1187.5 R45.2 ; v1(1957.87,154.33) 2045.67,154.33 U2.A3 ; R48.2 2041.88,1139.37 1991.88,1189.37 v1(1989.37,1189.37) 1969.69,1189.37 R45.2
  Bottom w10: v1(1957.87,154.33) 1890.94,221.26 1890.94,744.88 1989.37,843.31 v1(1989.37,1189.37)
NetR46_2: R46.2 R47.2 U2.A4 U5.8 | length 792.3
  Top w10: U5.8 1852,423 1875,400 1875,360.63 R46.2 1950,310.63 R47.2 2036.63,385.63 2075,424 2172.46,424 2205.91,390.55 2205.91,105.91 U2.A4
NetR47_1: R47.1 R49.2 U10.5 | length 219.7
  Top w10: U10.5 1950,625 2010.63,564.37 R49.2 2025,535.63 R47.1
NetR48_1: R48.1 R50.2 U10.3 | length 252.2
  Top w10: U10.3 2000,914.37 R50.2 ; R50.2@2025,964.37 R50.2 ; R48.1 2050,964.37 R50.2
NetR49_1: R49.1 R51.1 U2.D1 U10.7 | length 2151.3
  Top w10: U10.7 2050,600 2089.37,560.63 R49.1 2125,514.37 R51.1 2165.63,464.37 2220,410 2340,410 2360,430 2360,1005.67 2377.95,1023.62 2377.95,1847.05 2225,2000 U2.D1
NetR50_1: R50.1 R52.1 U2.D0 U10.1 | length 1237.1
  Top w10: U10.1 2100,939.37 R50.1 2114.37,1000 R52.1 2200,1085.63 v1(2200,1275)
  Bottom w10: v1(2200,1275) 2300,1375 U2.D0
NetR53_1: R53.1 R54.2 U4.10 U4.12 | length 288.8
  Top w10: U4.12 2075,1688 2075,1725 2100,1750 R54.2@2126,1750 ; U4.10 R54.2@2126,1750 ; R53.1 R54.2 2126,1763.37 R54.2@2126,1750
NetSW1_3: SW1.3 SW1.9 | length 98.4
  Top w10: SW1.3 SW1.9
NetSW1_6: SW1.6 SW1.12 | length 98.4
  Bottom w10: SW1.6 SW1.12
NetSW1_8: SW1.8 U7.9 | length 293.6
  Top w10: SW1.8 602.96,572.05 625,594.09 625,613.17 U7.9
NetSW1_11: SW1.11 U7.2 | length 462.3
  Top w10: SW1.11 445.77,808.27 575,937.5 712.5,937.5 725,925 725,886.83 U7.2
NetU1_5: U1.5 U2.D12 | length 372.6
  Top w10: U2.D12 1184,1856 U1.5
NetU1_13: U1.13 U2.D11 | length 636
  Top w10: U2.D11 1320,1820 1320,1634.96 1261,1575.96 U1.13
NetU2_D2: U2.D2 U8.13 | length 956.4
  Top w10: v3(1740,1520) 1741,1519 U8.13
  Bottom w10: v3(1740,1520) 1740,1915 1750,1925 1750,2040 1760,2050 2045,2050 2095,2000 U2.D2
NetU2_D4: U2.D4 U8.5 | length 642.4
  Top w10: U8.5 1664,1640 1693,1611 v3(1696,1611) ; v3(1696,1929) 1747,1929 1770.68,1952.68 1852.68,1952.68 U2.D4
  Bottom w10: v3(1696,1611) v3(1696,1929)
NetU2_D5: U2.D5 U4.5 | length 672.9
  Top w10: U4.5 2126,1526 v3(2127,1527)
  Bottom w10: U2.D5 2101,1699 2101,1591 2127,1565 v3(2127,1527)
NetU2_D7: U2.D7 U8.6 | length 512.3
  Top w10: U8.6 1639,1629.92 1648.25,1620.67 1648.25,1601.75 v1(1650,1600)
  Bottom w10: U2.D7 1650,1950 v1(1650,1600)
NetU2_D8: U2.D8 U9.6 | length 611.8
  Top w10: v1(1480,1550) 1501,1529 U9.6
  Bottom w10: v1(1480,1550) 1480,1960 1475,1965 ; 1475,1965 U2.D8 1475,1965
NetU2_D9: U2.D9 U9.12 | length 347.8
  Top w10: U2.D9 1424,1916 U9.12
NetU2_D10: U2.D10 U9.5 U9.13 | length 659.6
  Top w10: U2.D10 1399,1841 U9.13 1400,1686 1400,1640 1370,1610 1370,1596 1476,1490 U9.5
NetU2_D13: U2.D13 U7.5 U7.6 U7.12 U7.13 | length 1936.9
  Top w10: v1(625,800) 624,801 U7.6 U7.5 ; v1(724.41,559.06) 715.94,559.06 700,575 700,613.17 U7.12 U7.13
  Bottom w10: 650,950 625,925 v1(625,800) 600,775 600,737.5 612.5,725 662.5,725 725,662.5 724.41,661.91 v1(724.41,559.06) ; 750,1925 865,1925 U2.D13
  Bottom w12: 650,950 650,1825 750,1925
NetU4_8: U4.8 U4.9 | length 26
  Top w10: U4.9 U4.8
NetU4_13: U4.13 U4.14 | length 26
  Top w10: U4.14 U4.13
pads on no net: D5.2 U1.6 U2.A5 U2.AREF U2.IOREF U2.RESERVED U2.RESET U2.SCL U2.SDA U2.VIN U3.4 U3.5 U3.6 U3.7

## Polygon pours and split planes (outlines as drawn)
GND on Bottom "Polygon_1_Net_GND" (solid, remove dead copper, pour order 2): 1.06,2099.61 -9,-11.61 2423.01,-11.61 2423.01,2099.61
GND on Top "Polygon_1_Net_GND" (solid, remove dead copper, pour order 1): 10,2099.61 0,0 2432.01,0 2432.01,2089.61

## Keep-outs
Keep-Out Layer:
  the board outline again, w2

## Silkscreen, mask and mechanical layers (free items; w line width, h text height)
Top Overlay:
  text "V+" at 842,1628 h59.06
  text "V+" at 101,1625 h98.43
  text "V-" at 842,1573 h59.06
  text "V-" at 104,1525 h98.43
  text "A+" at 842,1516 h59.06
  text "A-" at 842,1460 h59.06
  text "A+" at 101,1425 h98.43
  text "A-" at 103,1332 h98.43
  text "ATR" at 984.25,1161.42 h59.06
  text "X1" at 32,931 h59.06
  text "VENT" at 842.52,543.31 h59.06 r90
  text "X100" at 43,485 h59.06
  text "PACEMAKER  REV 3.0" at 358.27,62.99 h59.06
Dimension:
  lines w0: 0,0 2432.01,0 2432.01,2099.61 0,2089.61 0,0
_tsilk:
  circle w12: c230,2000 r6.25
  circle w12: c330,2000 r6.25
  circle w12: c240,1787.5 r6.25
  circle w12: c325,1787.5 r6.25
  circle w5: c280,1912.5 r13.98
  circle w5: c280,1950 r13.98
  circle w5: c280,1875 r13.98
  circle w5: c280,1837.5 r13.98
  lines w5: 230.79,2000.79 242.6,2000.79 278.03,1965.35 ; 241,1787.5 241,1781.5 260.5,1762 337,1762 352,1777 352,1810 293.5,1868.5 293.5,1870 ; 284.5,1825 319.5,1790 320,1790 ; 293.78,1918.11 329.21,1953.54 329.21,2000.79 ; 192.5,1737.5 467.5,1737.5 467.5,1943.75 467.5,2050 192.5,2050 192.5,1737.5
  lines w12: 467.5,1943.75 854.18,1943.75 cw(c854.18,1938.76) 857.71,1942.29 ; 857,1942 903.5,1895.5 903.5,1816 956,1763.5 960,1767.5 960,1790 ; 930,1770 950,1790 950,1780 ; 960,1760 930,1760 ; 930,1760 910,1760 960,1810 960,1790 ; 930,1760 950,1780 ; 950,1780 960,1790 ; 60,1080 630,1080 630,1200 60,1200 60,1080
  text "V+" at 223.75,1943.75 h31
  text "V-" at 223.75,1906.25 h31
  text "A+" at 223.75,1868.75 h31
  text "A-" at 223.75,1831.25 h31
  text "PACING PINOUT" at 448.75,1768.75 h37.2 r90
  text "R_HEART" at 484.75,1768.75 h37.2 r90
  text "U8" at 1780.25,1749.5 h37.2 r270
  text "U1" at 1310,1746.25 h37.2 r270
  text "V+" at 35,1625 h77.5
  text "V-" at 35,1525 h77.5
  text "U9" at 1335,1445 h37.2 r90
  text "A+" at 35,1425 h77.5
  text "U4" at 2006.25,1425 h37.2 r90
  text "A-" at 35,1325 h77.5
  text "3.3V ONLY" at 106.02,1109.41 h55.25
  text "IC2" at 875,1062.5 h37.2
  text "x1" at 105,1015 h42.5 r270
  text "ATR" at 850,900 h62 r90
  text "U6" at 1875,900 h37.2 r180
  text "U10" at 2137.5,843.75 h37.2 r270
  text "U7" at 787.5,837.5 h37.2
  text "Attenuation" at 110,820 h25.5 r270
  text "U3" at 2356.25,762.5 h37.2 r270
  text "IC1" at 868.75,650 h37.2
  text "U5" at 1587.5,600 h37.2
  text "VENT" at 850,475 h62 r90
  text "x100" at 115,425 h42.5 r270
  text "GND" at 2225,225 h77.5
  text "pacemaker_v2_rev2" at 215,60 h34

## Text inside footprints (layer, text, board x,y; h text height)
A_IA_TP: Top 3D Body ">TP_SIGNAL_NAME" at 1187.5,937.5 h61.02
U2: Top Overlay "RST" at 1059.84,20 h50; Top Overlay "3V" at 1181.89,20 h50; Top Overlay "5V" at 1280.32,20 h50; Top Overlay "Gnd" at 1359.06,20 h50; Top Overlay "Vin" at 1571.07,20 h50; Top Overlay "Analog In" at 1965.35,20 h50; Top Overlay "0" at 1785,150 h50; Top Overlay "1" at 1885,150 h50; Top Overlay "2" at 1985,150 h50; Top Overlay "3" at 2085,150 h50; Top Overlay "4" at 2185,150 h50; Top Overlay "5" at 2285,150 h50; Top Overlay "ARef" at 690,1920 h50; Top Overlay "Gnd" at 800,2050 h50; Top Overlay "13" at 918.07,1920 h50; Top Overlay "12" at 1018.07,1920 h50; Top Overlay "11" at 1118.07,1920 h50; Top Overlay "10" at 1218.07,1920 h50; Top Overlay "9" at 1327.56,1920 h50; Top Overlay "8" at 1425.98,1920 h50; Top Overlay "7" at 1591.57,2045 h50; Top Overlay "6" at 1691.57,2045 h50; Top Overlay "5" at 1791.57,2045 h50; Top Overlay "4" at 1891.57,2045 h50; Top Overlay "3" at 1991.57,2045 h50; Top Overlay "2" at 2091.57,2045 h50; Top Overlay "1" at 2191,2047 h50; Top Overlay "0" at 2291.57,2045 h50; Top Overlay "Digital I/O" at 1095.28,2050 h50; Top Overlay "Digital I/O" at 1365,2049 h50; Top Overlay "SCL" at 496.85,1921.26 h50; Top Overlay "SDA" at 591.34,2050 h50; Top Overlay "IOr" at 973.23,20 h50; Top Overlay "Gnd" at 1465.35,20 h50
V_IA_TP: Top 3D Body ">TP_SIGNAL_NAME" at 1187.5,412.5 h61.02